# Altium PCB 把手锁主板2079.PcbDoc (part 2 of 2)
Units mm, origin at the board's own origin, x right, y up, seen from the top; angles counter-clockwise.
Board outline 151.13 x 26.04 mm, 2 copper layers (Top Layer, Bottom Layer); 73 components, 56 nets, 239 pads, 289 vias.
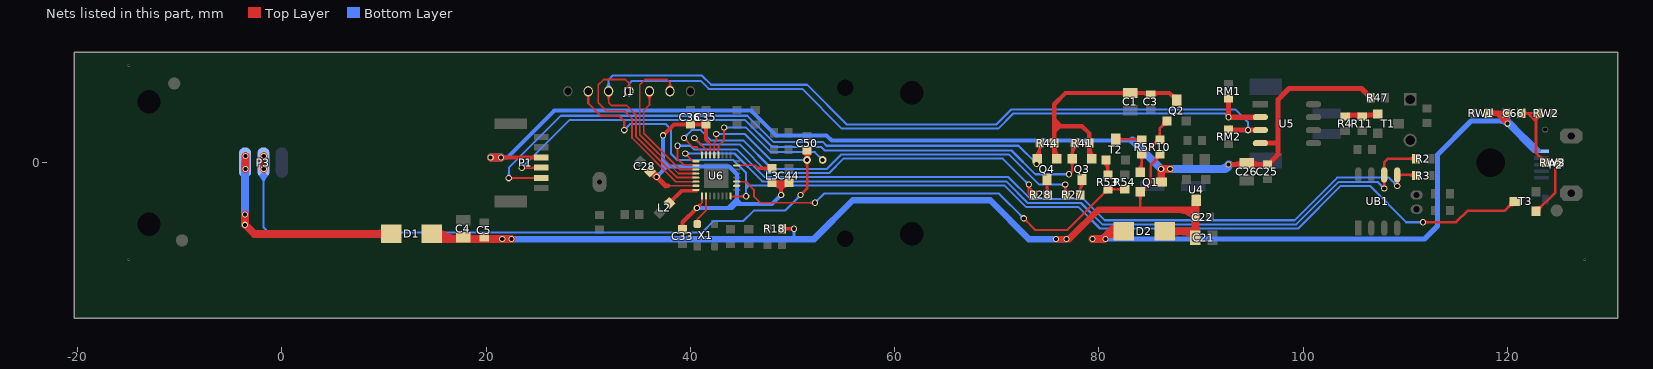
[diagram p2: the nets of this part, all layers, seen from the top]

## Via types
v1: diameter 0.61, hole 0.406, Top Layer to Bottom Layer, tented both sides, 289 vias

## Nets (pads, with @x,y where several pads share a name; then routed paths per layer and width w, separated by ;. In a path a pad name is that pad's centre, name@x,y a point inside that pad or via, vN(x,y) a via of type N, cw(c..) or ccw(c..) an arc to the next point about the centre after c; other vN are vias at no path point) (continued)
NetC66_2: C66.2 RW2.2 RW3.2 | length 12.5
  Top Layer w0.254: C66.2@121.361,4.826 122.02,4.826 ; C66.2@121.554,4.633 cw(c122.02,4.167) 122.02,4.826 ; C66.2@121.554,5.019 ccw(c122.02,5.485) 122.02,4.826 ; 122.809,3.977 cw(c123.377,3.977) RW2.2@123.199,4.517 ; 122.809,4.328 cw(c123.262,4.328) RW2.2@123.12,4.758 ; RW2.2@122.809,4.814 122.809,4.037 ; RW2.2@122.921,4.633 ccw(c122.455,4.167) 122.455,4.826 ccw(c122.455,5.485) RW2.2@122.921,5.019 ; RW2.2@123.114,4.826 122.02,4.826 ; 123.197,0.551 ccw(c123.749,1.103) RW3.2@123.749,0.323 ; 123.318,0.431 cw(c122.937,0.05) RW3.2@123.476,0.05 ; RW3.2@123.749,0 122.809,0.94 122.809,4.037 ; 122.02,4.826 122.809,4.037
NetD1_1: D1.1 P3.3 | length 27.1
  Top Layer w0.762: v1(-3.6,-5.08) v1(-3.6,-6.096) -2.711,-6.985 ; v1(-3.556,-0.635) v1(-3.556,0.635) ; -0.635,-6.985 -2.711,-6.985 ; D1.1@10.233,-7.352 ccw(c9.347,-8.238) 9.347,-6.985 ccw(c9.347,-5.732) D1.1@10.233,-6.618 ; D1.1@10.7,-6.985 -2.711,-6.985
  Bottom Layer w0.762: v1(-3.6,-6.096) v1(-3.6,-5.08) P3.3@-3.6,0
NetL2_2: L2.2 U6.32 | length 4
  Top Layer w0.356: L2.2@37.968,-3.942 39.134,-2.776 40.622,-2.776 ; L2.2@37.968,-3.72 ccw(c37.968,-3.183) 38.347,-3.563 ccw(c38.727,-3.942) L2.2@38.19,-3.942
NetL3_2: L3.2 U6.15 | length 4.5
  Top Layer w0.178: U6.15@44.545,-0.27 46.355,-0.27 46.644,-0.559
  Top Layer w0.305: 46.644,-0.559 L3.2@48.006,-0.559 ; L3.2@47.781,-0.734 ccw(c47.358,-1.157) 47.358,-0.559 ccw(c47.358,0.039) L3.2@47.781,-0.384
NetQ1_G: Q1.G Q2.G R5.1 R10.2 | length 13.6
  Top Layer w0.203: Q1.G@84.074,-0.955 84.201,-0.828 Q1.G@84.379,-0.65 ; R5.1@84.201,0.457 84.379,0.635 84.379,0.813 R5.1@84.379,0.94
  Top Layer w0.254: Q1.G@83.841,-0.722 ccw(c82.97,0.149) 84.201,0.149 ; R5.1@84.008,0.62 cw(c83.542,0.154) 84.201,0.154 cw(c84.86,0.154) R5.1@84.394,0.62 ; Q1.G@84.02,-0.901 ccw(c83.583,-0.464) 84.201,-0.464 ccw(c84.565,-0.464) Q1.G@84.307,-0.722 ; Q1.G@84.201,-0.828 R5.1@84.201,0.457 ; R5.1@84.201,0.813 84.379,0.813 85.801,2.235 R10.2@85.979,2.235 ; R5.1@84.251,1.086 ccw(c84.251,2.053) 84.935,1.369 ; R5.1@84.524,0.813 cw(c84.875,0.813) R5.1@84.627,1.061 ; 85.245,1.679 cw(c85.929,0.995) R10.2@85.929,1.962 ; R10.2@85.553,1.987 ccw(c85.305,2.235) R10.2@85.656,2.235 ; R10.2@85.786,2.428 ccw(c85.32,2.894) 85.979,2.894 ccw(c86.638,2.894) R10.2@86.172,2.428 ; R10.2@85.979,2.54 85.979,3.363 Q2.G@86.68,4.064 ; Q2.G@86.35,4.064 cw(c85.553,4.064) 86.116,3.5 cw(c86.68,2.937) Q2.G@86.68,3.734
NetR4_1: R4.1 R11.1 T1.1 | length 18.5
  Top Layer w0.254: R4.1@104.203,4.508 cw(c104.812,3.899) 104.812,4.76 ; R4.1@104.383,4.714 ccw(c104.849,5.18) 104.849,4.521 ccw(c104.849,3.862) 104.383,4.328 cw(c105.426,3.286) R11.1@105.426,4.76 ; R4.1@104.505,4.76 cw(c104.505,3.286) 105.548,4.328 ccw(c105.082,3.862) 105.082,4.521 ccw(c105.082,5.18) R11.1@105.548,4.714 ; 105.119,4.76 cw(c105.119,3.899) R11.1@105.728,4.508 ; R11.1@105.854,4.508 cw(c106.463,3.899) 106.463,4.76 ; R11.1@105.941,4.521 ccw(c105.941,6.134) 107.082,4.993 cw(c106.518,5.557) 106.518,4.76 cw(c106.518,3.963) T1.1@107.082,4.527 ; R11.1@106.034,4.714 ccw(c106.5,5.18) 106.5,4.521 ccw(c106.5,3.862) 106.034,4.328 cw(c107.077,3.286) T1.1@107.077,4.76 ; 106.554,4.521 ccw(c106.554,5.521) T1.1@107.261,4.814 ; R4.1@104.14,4.521 104.379,4.76 T1.1@107.315,4.76 107.076,4.521 R11.1@105.791,4.521 R4.1@104.14,4.521
NetR5_2: R5.2 T2.3 | length 5.2
  Top Layer w0.203: T2.3@81.661,2.286 R5.2@84.379,2.286 ; T2.3@81.912,2.035 cw(c82.519,1.428) 82.519,2.286 cw(c82.519,3.144) T2.3@81.912,2.537 ; 83.308,2.286 cw(c83.308,1.392) R5.2@83.94,2.024 ; 83.553,2.286 ccw(c83.553,2.833) R5.2@83.94,2.446
NetR27_2: R27.2 U6.24 | length 49
  Top Layer w0.178: v1@39.37,2.197 cw(c39.37,1.676) 39.739,2.044 cw(c40.107,2.413) v1@39.586,2.413 ; v1(39.37,2.413) 40.259,1.524 40.64,1.524 41.145,1.019 U6.24@41.145,0.73
  Top Layer w0.203: R27.2@76.548,-2.914 ccw(c76.161,-2.527) 76.708,-2.527 ; v1@76.564,-2.303 cw(c76.217,-2.65) 76.708,-2.65 cw(c77.199,-2.65) v1@76.852,-2.303 ; v1@76.708,-2.282 ccw(c77.602,-2.282) R27.2@76.97,-2.914 ; v1(76.708,-2.159) 76.708,-3.124 R27.2@76.759,-3.175
  Bottom Layer w0.203: v1(39.37,2.413) 40.132,3.175 41.021,3.175 42.015,2.181 45.19,2.181 47.997,-0.626 53.349,-0.626 54.759,0.784 71.225,0.784 74.168,-2.159 v1(76.708,-2.159) ; v1@39.37,2.616 ccw(c39.37,3.107) 39.717,2.76 ccw(c40.064,2.413) v1@39.573,2.413 ; v1@76.564,-2.303 ccw(c76.217,-2.65) 76.217,-2.159 ccw(c76.217,-1.668) v1@76.564,-2.015
NetR28_2: R28.2 U6.23 | length 45.3
  Top Layer w0.178: v1@40.386,2.197 cw(c40.386,1.676) 40.755,2.044 cw(c41.123,2.413) v1@40.602,2.413 ; v1(40.386,2.413) 41.545,1.254 U6.23@41.545,0.73
  Top Layer w0.254: v1@73.026,-2.285 cw(c72.723,-2.588) 73.152,-2.588 cw(c73.581,-2.588) v1@73.278,-2.285 ; 73.152,-2.855 ccw(c73.67,-2.855) R28.2@73.512,-3.349 ; 73.152,-2.507 ccw(c73.782,-2.507) R28.2@73.59,-3.107 ; R28.2@73.311,-3.113 ccw(c72.852,-3.093) 73.177,-2.768 ccw(c73.427,-2.518) R28.2@73.516,-2.861 ; R28.2@73.584,-3.175 73.152,-2.743 v1(73.152,-2.159) ccw(c73.893,-2.159) R28.2@73.667,-2.865
  Bottom Layer w0.203: v1@40.386,2.21 cw(c40.386,1.719) 40.733,2.066 cw(c41.08,2.413) v1@40.589,2.413 ; v1(40.386,2.413) 41.021,1.778 44.831,1.778 47.638,-1.029 53.581,-1.029 54.991,0.381 70.612,0.381 v1(73.152,-2.159) ; v1@72.949,-2.159 ccw(c72.458,-2.159) 72.805,-1.812 ccw(c73.152,-1.465) v1@73.152,-1.956
NetR53_2: R53.2 T2.1 | length 4.3
  Top Layer w0.254: T2.1@80.478,0.021 cw(c79.46,-0.997) R53.2@80.899,-0.997 ; T2.1@80.657,0.2 cw(c80.073,-0.384) 80.899,-0.384 ; R53.2@80.706,-1.001 ccw(c80.24,-0.535) 80.899,-0.535 ccw(c81.558,-0.535) R53.2@81.092,-1.001 ; T2.1@80.711,0.254 80.899,0.066 R53.2@80.899,-1.194
NetRW3_1: RW3.1 T3.1 | length 7.8
  Top Layer w0.254: T3.1@122.809,-4.76 122.875,-4.76 124.714,-2.921 124.714,-0.635 125.171,-0.178 RW3.1@125.171,0 ; T3.1@122.809,-4.43 ccw(c122.809,-3.473) 123.485,-4.15 ; T3.1@123.139,-4.76 cw(c123.777,-4.76) 123.326,-4.309 ; 124.778,-0.571 ccw(c124.436,-0.229) RW3.1@124.906,-0.115 ; RW3.1@124.923,-0.426 cw(c125.171,-0.674) RW3.1@125.171,-0.323
NetU6_2: U6.2 X1.1 | length 3.7
  Top Layer w0.152: X1.1@40.525,-6.035 X1.1@40.525,-5.885
  Top Layer w0.178: X1.1@40.567,-5.726 ccw(c40.483,-5.549) 40.679,-5.549 ; X1.1@40.679,-6.012 40.679,-5.549 ; X1.1@40.791,-5.726 cw(c40.875,-5.549) 40.679,-5.549 ; U6.2@41.545,-3.27 41.545,-4.683 40.679,-5.549
P04/LED_RED: J1.3 U6.27 | length 12.3
  Top Layer w0.178: J1.3@35.75,6.68 cw(c35.133,6.063) 36.005,6.063 cw(c36.877,6.063) J1.3@36.26,6.68 ; J1.3@36.005,6.985 36.005,5.652 35.433,5.08 35.433,2.873 38.976,-0.67 U6.27@40.545,-0.67
P05/LED_GREEN: J1.2 U6.28 | length 17.3
  Top Layer w0.178: J1.2@37.764,7.304 ccw(c37.284,7.842) 38.005,7.842 ; J1.2@38.005,6.985 38.005,7.842 ; J1.2@38.246,7.304 cw(c38.726,7.842) 38.005,7.842 ; U6.28@40.545,-1.07 38.842,-1.07 35.052,2.72 35.052,7.62 35.56,8.128 37.719,8.128 38.005,7.842
P06/MOTO1: J1.5 RM2.2 U5.3 U6.29 | length 88.7
  Top Layer w0.178: J1.5@31.75,6.68 cw(c31.133,6.063) 32.005,6.063 cw(c32.877,6.063) J1.5@32.26,6.68 ; J1.5@32.005,6.985 32.005,5.841 32.258,5.588 33.782,5.588 34.671,4.699 34.671,2.566 38.707,-1.47 U6.29@40.545,-1.47
  Top Layer w0.508: RM2.2@92.786,3.175 v1(94.615,3.175) U5.3@95.825,3.175 ; RM2.2@92.863,3.354 ccw(c93.296,3.788) 93.296,3.175
  Bottom Layer w0.203: J1.5@31.759,7.281 ccw(c31.164,7.876) 32.005,7.876 ccw(c32.846,7.876) J1.5@32.251,7.281 ; J1.5@32.005,6.985 32.005,8.129 32.385,8.509 41.148,8.509 42.037,7.62 51.435,7.62 55.328,3.727 69.969,3.727 71.449,5.207 93.345,5.207 94.615,3.937 v1(94.615,3.175) ; v1@94.471,3.319 ccw(c94.124,3.666) 94.615,3.666 ccw(c95.106,3.666) v1@94.759,3.319
P07/MOTO0: J1.4 RM1.2 U5.2 U6.30 | length 89
  Top Layer w0.178: J1.4@33.782,7.319 ccw(c33.421,7.778) 34.005,7.778 ccw(c34.589,7.778) J1.4@34.228,7.319 ; J1.4@34.005,6.985 34.005,7.778 33.655,8.128 31.496,8.128 30.988,7.62 30.988,5.842 31.75,5.08 33.528,5.08 34.29,4.318 34.29,2.413 38.573,-1.87 U6.30@40.545,-1.87
  Top Layer w0.508: RM1.2@92.71,6.274 v1(92.71,4.445) U5.2@95.825,4.445
  Bottom Layer w0.203: J1.4@33.801,7.318 ccw(c33.514,7.716) 34.005,7.716 ; J1.4@34.005,6.985 34.005,7.716 ; J1.4@34.209,7.318 cw(c34.496,7.716) 34.005,7.716 ; v1(92.71,4.445) 92.351,4.804 71.616,4.804 70.136,3.324 54.842,3.324 50.949,7.217 41.805,7.217 41.021,8.001 34.29,8.001 34.005,7.716
PWR_CTL: R53.1 R54.2 U6.11 | length 49.3
  Top Layer w0.178: U6.11@44.545,-1.87 45.431,-1.87 46.228,-2.667 46.228,-3.302 46.863,-3.937 v1(52.197,-3.937) ; v1@52.044,-4.09 ccw(c51.676,-4.458) 51.676,-3.937 ccw(c51.676,-3.416) v1@52.044,-3.784
  Top Layer w0.203: v1@72.644,-5.664 cw(c72.644,-6.155) 72.991,-5.808 cw(c73.338,-5.461) v1@72.847,-5.461 ; v1(72.644,-5.461) 73.787,-6.604 76.911,-6.604 R53.1@80.899,-2.616 R54.2@82.55,-2.616 ; 80.304,-3.211 ccw(c79.709,-2.616) R53.1@80.551,-2.616 ; 80.425,-3.09 cw(c80.849,-3.514) R53.1@80.849,-2.915 ; R53.1@81.16,-2.827 cw(c81.669,-3.337) 81.669,-2.616 cw(c81.669,-1.896) R53.1@81.16,-2.405 ; R54.2@82.289,-2.827 ccw(c81.78,-3.337) 81.78,-2.616 ccw(c81.78,-1.896) R54.2@82.289,-2.405
  Bottom Layer w0.203: v1(52.197,-3.937) 53.086,-3.048 70.231,-3.048 v1(72.644,-5.461) ; v1@52.197,-3.734 ccw(c52.197,-3.243) 52.544,-3.59 ccw(c52.891,-3.937) v1@52.4,-3.937 ; v1@72.441,-5.461 ccw(c71.95,-5.461) 72.297,-5.114 ccw(c72.644,-4.767) v1@72.644,-5.258
REMOTO: U6.10
RSTN: J1.6 T3.3 U6.8 | length 114.8
  Top Layer w0.203: J1.6@29.759,6.689 cw(c29.164,6.094) 30.005,6.094 cw(c30.846,6.094) J1.6@30.251,6.689 ; J1.6@30.005,6.985 30.005,5.809 31.242,4.572 33.02,4.572 33.528,4.064 v1(33.528,3.175) ; v1@33.384,3.319 ccw(c33.037,3.666) 33.528,3.666 ccw(c34.019,3.666) v1@33.672,3.319 ; U6.8@43.947,-3.27 43.979,-3.302 v1(45.466,-3.302) ; v1@45.322,-3.446 ccw(c44.975,-3.793) 44.975,-3.302 ccw(c44.975,-2.811) v1@45.322,-3.158
  Top Layer w0.254: v1(111.76,-5.842) 114.997,-5.842 116.14,-4.699 119.761,-4.699 120.65,-3.81 T3.3@120.777,-3.81 ; v1@111.886,-5.968 cw(c112.189,-6.271) 112.189,-5.842 cw(c112.189,-5.413) v1@111.886,-5.716 ; 120.062,-4.398 cw(c120.684,-5.02) T3.3@120.684,-4.14 ; 120.145,-4.315 ccw(c119.639,-3.81) T3.3@120.354,-3.81
  Bottom Layer w0.203: v1(33.528,3.175) 34.134,3.781 37.592,3.781 38.1,3.273 38.1,0.889 38.735,0.254 44.196,0.254 45.466,-1.016 45.466,-1.905 ; v1@33.528,3.378 ccw(c33.528,3.869) 33.875,3.522 ccw(c34.222,3.175) v1@33.731,3.175 ; v1@45.322,-3.158 ccw(c44.975,-2.811) 45.466,-2.811 ccw(c45.957,-2.811) v1@45.61,-3.158 ; v1(45.466,-3.302) 45.466,-2.54 ; v1@111.616,-5.986 ccw(c111.269,-6.333) 111.269,-5.842 ccw(c111.269,-5.351) v1@111.616,-5.698 ; v1(111.76,-5.842) 110.109,-5.842 106.553,-2.286 103.697,-2.286 99.528,-6.455 80.115,-6.455 78.029,-4.369 72.884,-4.369 70.754,-2.238 45.799,-2.238 ; 45.466,-2.54 45.466,-2.235 ; 45.466,-2.54 45.768,-2.238 ; 45.466,-2.235 45.466,-1.905 ; 45.466,-2.235 45.469,-2.238 45.768,-2.238 ; 45.466,-1.905 45.799,-2.238 ; 45.768,-2.238 45.799,-2.238
RX2/SETKEY: C50.1 P3.2 pad.2@51.435,0.254 U6.21 | length 92.3
  Top Layer w0.178: U6.21@42.345,0.73 42.345,1.959 42.545,2.159 v1(42.545,2.794) ; v1@42.392,2.68 cw(c42.024,2.311) 42.545,2.311 cw(c43.066,2.311) v1@42.698,2.68
  Top Layer w0.254: v1(50.8,-3.175) 51.435,-2.54 pad.2@51.435,0.254 ; v1@50.8,-2.997 ccw(c50.8,-2.568) 51.104,-2.871 ccw(c51.407,-3.175) v1@50.978,-3.175 ; C50.1@51.13,0.889 pad.2@51.435,0.584 ; C50.1@51.253,0.99 cw(c50.891,0.584) pad.2@51.435,0.584 ; pad.2@51.255,0.074 cw(c50.822,-0.359) 51.435,-0.359 cw(c52.048,-0.359) pad.2@51.615,0.074 ; pad.2@51.255,0.434 ccw(c50.822,0.867) 51.435,0.867 ccw(c52.048,0.867) pad.2@51.615,0.434 ; 51.296,0.723 cw(c50.933,0.361) pad.2@51.435,0.254 ; C50.1@51.435,1.194 pad.2@51.435,0.584 ; 51.495,0.644 ccw(c51.731,0.408) pad.2@51.435,0.254 ; C50.1@51.617,0.99 ccw(c51.979,0.584) pad.2@51.435,0.584 ; pad.2@51.66,0.371 cw(c52.053,0.576) 51.74,0.889 pad.2@51.435,0.584 ; pad.2@51.435,0.254 pad.2@51.435,0.584
  Top Layer w0.762: v1(-1.778,-0.635) v1(-1.778,0.635)
  Bottom Layer w0.178: v1@42.684,2.641 cw(c43.053,2.273) 43.053,2.794 cw(c43.053,3.315) v1@42.684,2.947
  Bottom Layer w0.203: P3.2@-2.152,-1.252 cw(c-3.003,-2.103) -1.8,-2.103 cw(c-0.597,-2.103) P3.2@-1.448,-1.252 ; P3.2@-2.009,-1.109 cw(c-2.513,-1.613) -1.8,-1.613 cw(c-1.087,-1.613) P3.2@-1.591,-1.109 ; P3.2@-1.922,-0.779 cw(c-2.215,-1.072) P3.2@-1.8,-1.072 ; P3.2@-1.922,-0.491 ccw(c-2.215,-0.198) P3.2@-1.8,-0.198 ; P3.2@-1.8,-1.179 cw(c-1.234,-1.179) P3.2@-1.634,-0.779 ; P3.2@-1.8,-0.091 ccw(c-1.234,-0.091) P3.2@-1.634,-0.491 ; P3.2@-1.8,0 -1.8,-6.328 -1.27,-6.858 41.148,-6.858 42.291,-5.715 45.212,-5.715 46.228,-4.699 49.276,-4.699 v1(50.8,-3.175) ; v1(42.545,2.794) 45.339,2.794 47.879,0.254 pad.2@51.435,0.254 ; v1@50.597,-3.175 cw(c50.106,-3.175) 50.453,-3.522 cw(c50.8,-3.869) v1@50.8,-3.378 ; pad.2@51.291,0.11 ccw(c50.944,-0.237) 50.944,0.254 ccw(c50.944,0.745) pad.2@51.291,0.398
SCL: R2.2 U6.25 UB1.6 | length 85.9
  Top Layer w0.178: v1@39.484,0.686 cw(c39.484,0.165) 39.853,0.533 cw(c40.221,0.902) v1@39.7,0.902 ; v1(39.497,0.889) 40.256,0.13 U6.25@40.545,0.13
  Top Layer w0.254: v1@107.824,-2.414 ccw(c107.521,-2.111) 107.95,-2.111 ccw(c108.379,-2.111) v1@108.076,-2.414 ; UB1.6@107.828,-1.782 cw(c107.532,-2.078) 107.95,-2.078 cw(c108.368,-2.078) UB1.6@108.072,-1.782 ; UB1.6@107.828,-0.638 ccw(c107.532,-0.342) 107.95,-0.342 ccw(c108.368,-0.342) UB1.6@108.072,-0.638 ; v1(107.95,-2.54) UB1.6@107.95,-1.21 107.95,0 108.331,0.381 R2.2@111.049,0.381 ; R2.2@110.856,0.188 ccw(c110.39,-0.278) 110.39,0.381 ccw(c110.39,1.04) R2.2@110.856,0.574
  Bottom Layer w0.203: v1(39.497,0.889) 44.323,0.889 47.047,-1.835 70.921,-1.835 73.045,-3.959 78.254,-3.959 80.347,-6.052 99.339,-6.052 103.508,-1.883 107.293,-1.883 v1(107.95,-2.54) ; v1@39.636,0.736 cw(c40.005,0.368) 40.005,0.889 cw(c40.005,1.41) v1@39.636,1.042 ; v1@107.747,-2.54 ccw(c107.256,-2.54) 107.603,-2.193 ccw(c107.95,-1.846) v1@107.95,-2.337
SDA: R3.2 U6.26 UB1.5 | length 91.1
  Top Layer w0.178: v1@38.582,1.512 cw(c38.214,1.143) 38.735,1.143 cw(c39.256,1.143) v1@38.888,1.512 ; v1(38.735,1.651) 38.735,0.381 39.386,-0.27 U6.26@40.545,-0.27
  Top Layer w0.254: v1@109.094,-2.16 ccw(c108.791,-1.857) 109.22,-1.857 ccw(c109.649,-1.857) v1@109.346,-2.16 ; UB1.5@109.098,-1.782 cw(c108.802,-2.078) 109.22,-2.078 cw(c109.638,-2.078) UB1.5@109.342,-1.782 ; v1(109.22,-2.286) UB1.5@109.22,-1.21 110.989,-1.21 R3.2@111.049,-1.27 ; UB1.5@109.342,-1.332 cw(c109.638,-1.628) 109.638,-1.21 cw(c109.638,-0.792) UB1.5@109.342,-1.088 ; 110.366,-1.21 cw(c110.366,-1.903) R3.2@110.856,-1.413 ; 110.414,-1.21 ccw(c110.414,-0.585) R3.2@110.856,-1.027
  Bottom Layer w0.203: v1(38.735,1.651) 40.005,1.651 40.364,1.292 44.555,1.292 47.279,-1.432 50.2,-1.432 ; v1@38.874,1.498 cw(c39.243,1.13) 39.243,1.651 cw(c39.243,2.172) v1@38.874,1.804 ; 53.975,-1.432 50.2,-1.432 ; v1@109.017,-2.286 ccw(c108.526,-2.286) 108.873,-1.939 ccw(c109.22,-1.592) v1@109.22,-2.083 ; v1(109.22,-2.286) 108.414,-1.48 103.341,-1.48 99.172,-5.648 80.578,-5.648 78.486,-3.556 73.279,-3.556 71.155,-1.432 50.2,-1.432
TX2: pad.0 U6.20 | length 16.4
  Top Layer w0.178: U6.20@42.745,0.73 42.745,1.623 43.307,2.185 v1(43.307,3.429) ; v1@43.154,3.29 cw(c42.786,2.921) 43.307,2.921 cw(c43.828,2.921) v1@43.46,3.29
  Bottom Layer w0.203: v1@43.18,3.429 v1(43.307,3.429) 45.466,3.429 47.879,1.016 52.197,1.016 pad.0@52.959,0.254 ; v1@43.446,3.276 cw(c43.815,2.908) 43.815,3.429 cw(c43.815,3.95) v1@43.446,3.582 ; pad.0@52.756,0.254 ccw(c52.265,0.254) 52.612,0.601 ccw(c52.959,0.948) pad.0@52.959,0.457
UART_RD: P1.5 Q4.S R44.1 | length 72.4
  Top Layer w0.203: v1(22.225,-1.524) 25.376,-1.524 P1.5@25.4,-1.5 ; v1@22.369,-1.668 cw(c22.716,-2.015) 22.716,-1.524 cw(c22.716,-1.033) v1@22.369,-1.38 ; 24.463,-1.524 ccw(c24.463,-0.963) P1.5@24.86,-1.36 ; 24.579,-1.524 cw(c24.579,-1.921) P1.5@24.86,-1.64
  Top Layer w0.254: Q4.S@73.747,0.614 ccw(c72.606,1.755) R44.1@74.219,1.755 ; Q4.S@73.789,0.112 cw(c73.616,-0.131) 73.914,-0.131 cw(c74.113,-0.131) Q4.S@74.063,0.061 ; Q4.S@73.853,0.508 Q4.S@73.98,0.381 73.914,0.315 v1(73.914,-0.127) 74.219,0.178 R44.1@74.219,1.905 R44.1@73.98,1.666 ; Q4.S@73.926,0.435 ccw(c73.219,1.142) 74.219,1.142 ; v1@73.968,-0.181 ccw(c73.362,0.425) Q4.S@74.219,0.425 ; R44.1@74.026,1.662 cw(c73.56,1.196) 74.219,1.196 cw(c74.878,1.196) R44.1@74.412,1.662 ; Q4.S@74.04,-0.001 cw(c74.343,0.302) 73.914,0.302 cw(c73.485,0.302) 73.788,-0.001 ccw(c72.749,1.038) 74.219,1.038
  Bottom Layer w0.203: v1@22.081,-1.38 ccw(c21.734,-1.033) 22.225,-1.033 ccw(c22.716,-1.033) v1@22.369,-1.38 ; v1(22.225,-1.524) 22.225,-0.508 27.321,4.588 45.577,4.588 48.133,2.032 52.959,2.032 53.34,1.651 72.136,1.651 v1(73.914,-0.127) ; v1@73.711,-0.127 ccw(c73.22,-0.127) 73.567,0.22 ccw(c73.914,0.567) v1@73.914,0.076
UART_RD1: Q4.D R28.1 | length 3.8
  Top Layer w0.254: Q4.D@74.697,-1.977 cw(c74.133,-2.541) 74.93,-2.541 cw(c75.727,-2.541) Q4.D@75.163,-1.977 ; R28.1@74.813,-2.932 ccw(c74.531,-2.65) 74.93,-2.65 ; 74.93,-2.282 ccw(c75.849,-2.282) R28.1@75.199,-2.932 ; Q4.D@74.93,-1.651 74.93,-3.099 R28.1@75.006,-3.175
UART_TD: P1.4 Q3.S R41.1 | length 71
  Top Layer w0.203: v1(23.495,-0.508) 25.392,-0.508 P1.4@25.4,-0.5 ; v1@23.639,-0.652 cw(c23.986,-0.999) 23.986,-0.508 cw(c23.986,-0.017) v1@23.639,-0.364 ; 24.502,-0.508 ccw(c24.502,-0.002) P1.4@24.86,-0.36 ; 24.54,-0.508 cw(c24.54,-0.96) P1.4@24.86,-0.64
  Top Layer w0.254: v1(77.089,-1.143) 77.409,-0.823 Q3.S@77.409,0.381 77.409,1.666 R41.1@77.648,1.905 ; v1@77.089,-0.965 ccw(c77.089,-0.536) 77.393,-0.839 ccw(c77.696,-1.143) v1@77.267,-1.143 ; Q3.S@77.176,0.148 cw(c76.612,-0.416) 77.409,-0.416 cw(c78.206,-0.416) Q3.S@77.642,0.148 ; Q3.S@77.176,0.614 ccw(c76.612,1.178) 77.409,1.178 ccw(c78.206,1.178) Q3.S@77.642,0.614 ; Q3.S@77.409,0.619 cw(c78.883,0.619) R41.1@77.841,1.662 ; 77.409,1.233 cw(c78.27,1.233) R41.1@77.661,1.842
  Bottom Layer w0.203: v1(23.495,-0.508) 28.188,4.185 45.345,4.185 48.006,1.524 52.832,1.524 53.169,1.187 71.457,1.187 73.787,-1.143 v1(77.089,-1.143) ; v1@23.495,-0.305 ccw(c23.495,0.186) 23.842,-0.161 ccw(c24.189,-0.508) v1@23.698,-0.508 ; v1@76.945,-1.287 ccw(c76.598,-1.634) 76.598,-1.143 ccw(c76.598,-0.652) v1@76.945,-0.999
UART_TD1: Q3.D R27.1 | length 6.3
  Top Layer w0.152: R27.1@77.952,-2.896 ccw(c77.399,-2.343) 78.181,-2.343 ccw(c78.963,-2.343) R27.1@78.41,-2.896 ; R27.1@78.06,-3.004 ccw(c77.767,-2.711) 78.181,-2.711 ccw(c78.595,-2.711) R27.1@78.302,-3.004 ; Q3.D@78.09,-2.013 cw(c77.868,-2.234) 78.181,-2.234 ; R27.1@78.181,-3.175 Q3.D@78.181,-1.727 ; R27.1@78.181,-3.093 cw(c79.708,-3.093) Q3.D@78.628,-2.013 ; 78.181,-2.725 cw(c79.34,-2.725) Q3.D@78.521,-1.905 ; 78.181,-2.357 cw(c78.972,-2.357) Q3.D@78.413,-1.798
V6V: C25.1 C26.1 P1.3 Q1.D R47.2 U5.4 | length 109.9
  Top Layer w0.406: v1(21.463,0.508) 25.392,0.508 P1.3@25.4,0.5
  Top Layer w0.508: v1(92.71,-0.178) C25.1@96.52,-0.178 96.596,-0.178 97.536,0.762 97.536,1.905 ; 93.365,-0.178 ccw(c93.365,0.869) C26.1@94.105,0.129 ; C26.1@94.871,0.129 ccw(c95.611,0.869) 95.611,-0.178 ; U5.4@95.825,1.905 97.536,1.905 ; R47.2@106.269,6.685 ccw(c106.604,7.019) R47.2@106.604,6.546 ; R47.2@106.604,6.35 105.715,7.239 98.628,7.239 97.536,6.147 97.536,1.905
  Top Layer w0.762: v1(20.447,0.508) v1(21.463,0.508) ; Q1.D@86.106,-1.905 v1(86.106,-0.635) v1(86.995,-0.635)
  Bottom Layer w0.406: v1(21.463,0.508) 22.098,0.508 26.683,5.093 45.961,5.093 48.387,2.667 53.34,2.667 53.848,2.159 83.312,2.159
  Bottom Layer w0.762: v1(20.447,0.508) v1(21.463,0.508) ; 83.312,2.159 v1(86.106,-0.635) v1(86.995,-0.635) 92.253,-0.635 ; 91.79,-0.635 ccw(c91.79,0.742) v1@92.764,-0.232 ; v1(92.71,-0.178) 92.253,-0.635 ; v1@92.785,-0.192 cw(c92.253,-0.094) 92.253,-0.635
VBAT: C4.1 C5.1 C21.1 C22.1 D1.2 D2.2 Q1.S R10.1 R18.1 U4.3 | length 112.2
  Top Layer w0.254: Q1.S@83.841,-3.088 cw(c83.277,-3.652) 84.074,-3.652 cw(c84.871,-3.652) Q1.S@84.307,-3.088 ; 84.074,-4.597 Q1.S@84.074,-2.855 84.191,-2.855 85.09,-1.956 85.09,-0.254 85.801,0.457 R10.1@85.801,0.635 ; Q1.S@84.074,-2.525 ccw(c84.074,-1.446) 84.837,-2.209 ; Q1.S@84.404,-2.855 cw(c84.919,-2.855) 84.555,-2.491 ; 85.302,-0.042 ccw(c84.447,0.813) R10.1@85.656,0.813 ; 85.735,0.391 ccw(c85.314,0.813) R10.1@85.91,0.813
  Top Layer w0.305: R18.1@48.971,-6.477 v1(50.165,-6.477) ; R18.1@49.146,-6.652 cw(c49.569,-7.075) 49.569,-6.477 cw(c49.569,-5.879) R18.1@49.146,-6.302 ; v1@50.057,-6.585 ccw(c49.797,-6.845) 49.797,-6.477 ccw(c49.797,-6.109) v1@50.057,-6.369
  Top Layer w0.635: v1(75.819,-7.493) v1(76.835,-7.493) 77.089,-7.493 79.985,-4.597 84.074,-4.597 89.433,-4.597 89.459,-4.572 ; v1@76.835,-7.506 ccw(c76.835,-6.923) 77.247,-7.335 ; 87.602,-4.597 cw(c87.602,-7.141) C22.1@89.4,-5.342
  Top Layer w0.762: D1.2@14.7,-6.985 15.208,-7.493 v1(21.59,-7.493) v1(22.479,-7.493) ; D1.2@15.167,-6.618 ccw(c17.279,-4.506) C4.1@17.279,-7.493 ; 16.841,-7.493 ccw(c16.841,-6.579) C4.1@17.487,-7.225 ; C4.1@18.073,-7.225 ccw(c18.719,-6.579) 18.719,-7.493 ; 19.287,-7.493 ccw(c19.287,-6.84) C5.1@19.749,-7.302 ; C5.1@19.875,-7.302 ccw(c20.337,-6.84) 20.337,-7.493 ; D2.2@86.455,-6.731 89.459,-6.731 C22.1@89.459,-5.334 89.459,-4.572 89.459,-3.759 U4.3@89.535,-3.683 ; D2.2@86.922,-7.098 cw(c87.808,-7.984) 87.808,-6.731 cw(c87.808,-5.478) D2.2@86.922,-6.364 ; 88.11,-6.731 cw(c88.11,-8.512) C21.1@89.369,-7.253
  Bottom Layer w0.305: v1@50.057,-6.585 cw(c49.797,-6.845) 50.165,-6.845 cw(c50.533,-6.845) v1@50.273,-6.585 ; 50.165,-7.493 v1(50.165,-6.477)
  Bottom Layer w0.635: v1(21.59,-7.493) v1(22.479,-7.493) 50.165,-7.493 52.122,-7.493 55.916,-3.699 69.358,-3.699 73.152,-7.493 v1(75.819,-7.493) v1(76.835,-7.493)
VBUS: C66.1 D2.1 P2.1 RW1.1 | length 76.4
  Top Layer w0.508: RW1.1@118.186,4.826 118.999,4.826 ; C66.1@119.836,4.673 cw(c119.402,4.24) 120.015,4.24 ; 118.999,4.826 v1(120.015,3.81) 120.015,4.75 C66.1@119.939,4.826 118.999,4.826
  Top Layer w0.762: v1(79.375,-7.493) 80.391,-7.493 81.153,-6.731 ; v1@80.552,-7.332 cw(c81.415,-8.195) D2.1@82.075,-7.168 ; v1@80.569,-7.493 cw(c80.998,-7.493) 80.695,-7.189 ; 80.883,-7.001 cw(c82.153,-8.27) D2.1@82.387,-6.49 ; 81.221,-6.663 cw(c81.938,-7.38) D2.1@82.486,-6.526 ; D2.1@81.977,-7.087 ccw(c81.153,-7.863) 81.153,-6.731 ; D2.1@81.977,-6.375 cw(c81.153,-5.599) 81.153,-6.731 ; D2.1@82.455,-6.731 81.153,-6.731
  Bottom Layer w0.508: v1(79.375,-7.493) 111.887,-7.493 113.157,-6.223 113.157,0.762 116.459,4.064 119.761,4.064 ; 119.279,4.064 cw(c119.279,3.074) v1@119.979,3.774 ; v1@120.015,3.759 cw(c120.015,2.717) 120.752,3.454 ; P2.1@123.063,1.194 P2.1@123.012,1.194 ; 119.761,4.064 120.142,4.064 120.396,3.81 ; 119.761,4.064 v1(120.015,3.81) ; v1(120.015,3.81) 122.631,1.194 P2.1@123.012,1.194 ; v1(120.015,3.81) 120.396,3.81 ; 120.396,3.81 P2.1@123.012,1.194 ; v1@120.029,3.761 cw(c120.189,3.222) 120.586,3.62 ccw(c120.189,3.222) v1@120.029,3.761
  other v1: 80.645,-7.493
VDD: C28.2 C33.2 C35.2 C36.2 C44.2 L3.1 U6.1 U6.22 U6.31 | length 58.1
  Top Layer w0.178: 37.846,-2.27 U6.31@40.545,-2.27 ; v1@40.64,-4.229 ccw(c40.64,-3.708) 41.009,-4.076 ccw(c41.377,-4.445) v1@40.856,-4.445 ; 40.894,-4.191 41.145,-3.94 U6.1@41.145,-3.27 ; 41.737,2.078 41.945,1.87 U6.22@41.945,0.73
  Top Layer w0.406: C28.2@36.068,-0.635 C28.2@36.19,-0.757 ; C28.2@36.098,-1.045 cw(c36.098,-1.656) v1@36.53,-1.224 ; v1(37.338,2.667) 38.405,3.734 C36.2@40.005,3.734 C35.2@41.529,3.734 41.529,2.286 41.737,2.078 ; 37.576,-2.27 37.846,-2.27 ; C33.2@39.104,-6.389 ccw(c38.768,-6.053) 39.243,-6.053 ccw(c39.718,-6.053) C33.2@39.382,-6.389 ; C33.2@39.243,-6.528 39.243,-5.842 v1(40.64,-4.445) 40.894,-4.191 ; C36.2@39.816,3.595 ccw(c39.48,3.259) 39.48,3.734 ccw(c39.48,4.209) C36.2@39.816,3.873 ; C36.2@40.194,3.595 cw(c40.53,3.259) 40.53,3.734 cw(c40.53,4.209) C36.2@40.194,3.873 ; C35.2@41.34,3.595 ccw(c41.004,3.259) 41.004,3.734 ccw(c41.004,4.209) C35.2@41.34,3.873 ; C35.2@41.39,3.595 cw(c41.054,3.259) 41.529,3.259 cw(c42.004,3.259) C35.2@41.668,3.595 ; L3.1@48.006,-1.981 L3.1@48.336,-1.981 ; L3.1@48.056,-2.178 cw(c48.056,-3.33) 48.87,-2.515 ; L3.1@48.195,-2.12 cw(c48.531,-2.456) 48.531,-1.981 cw(c48.531,-1.506) L3.1@48.195,-1.842 ; v1(48.895,-3.175) 48.895,-2.54 ; 49.01,-2.425 cw(c49.607,-3.023) C44.2@49.607,-2.178 ; C44.2@49.468,-2.12 ccw(c49.132,-2.456) 49.132,-1.981 ccw(c49.132,-1.506) C44.2@49.468,-1.842 ; C44.2@49.657,-1.981 C44.2@49.454,-1.981 ; L3.1@48.336,-1.981 48.895,-1.981 ; L3.1@48.336,-1.981 48.895,-2.54 ; 48.895,-2.54 C44.2@49.454,-1.981 ; 48.895,-2.54 48.895,-1.981 ; 48.895,-1.981 C44.2@49.454,-1.981
  Top Layer w0.508: v1(36.703,-1.397) 37.576,-2.27
  Top Layer w0.762: C28.2@36.19,-0.884 v1(36.703,-1.397)
  Bottom Layer w0.406: v1(36.703,-1.397) 37.338,-0.762 ; 37.338,1.397 37.338,0.254 ; v1(37.338,2.667) 37.338,0.254 ; 38.1,-0.381 37.973,-0.381 ; v1(40.64,-4.445) 43.688,-4.445 ; v1(48.895,-3.175) 48.006,-4.064 44.958,-4.064 ; 37.338,-0.762 37.719,-0.381 ; 37.338,-0.762 37.338,-0.381 ; 37.338,-0.381 37.338,0.254 ; 37.338,-0.381 37.719,-0.381 ; 37.338,0.254 37.973,-0.381 ; 37.719,-0.381 37.973,-0.381 ; 37.973,-0.381 43.815,-0.381 44.577,-1.143 44.577,-3.556 ; 43.688,-4.445 44.069,-4.445 44.45,-4.064 ; 43.688,-4.445 44.577,-3.556 ; 44.45,-4.064 44.577,-4.064 ; 44.45,-4.064 44.577,-3.937 ; 44.577,-4.064 44.831,-4.064 ; 44.577,-4.064 44.577,-3.937 ; 44.577,-3.937 44.577,-3.81 ; 44.577,-3.81 44.577,-3.683 ; 44.577,-3.81 44.831,-4.064 ; 44.577,-3.683 44.958,-4.064 ; 44.577,-3.683 44.577,-3.556 ; 44.831,-4.064 44.958,-4.064
VDD3V3: C1.1 C3.1 Q2.D Q3.G Q4.G R41.2 R44.2 | length 36
  Top Layer w0.406: R44.2@75.502,1.716 cw(c75.166,1.38) 75.641,1.38 cw(c76.116,1.38) R44.2@75.78,1.716 ; R44.2@75.502,2.094 ccw(c75.166,2.43) 75.641,2.43 ccw(c76.116,2.43) R44.2@75.78,2.094 ; R44.2@75.641,1.571 ccw(c77.07,1.571) Q4.G@76.06,0.561 ; Q4.G@75.88,0.381 75.641,0.62 R44.2@75.641,1.905 75.641,3.048 ; R41.2@78.931,1.716 cw(c78.595,1.38) 79.07,1.38 cw(c79.545,1.38) R41.2@79.209,1.716 ; R41.2@78.931,2.094 ccw(c78.595,2.43) 79.07,2.43 ccw(c79.545,2.43) R41.2@79.209,2.094 ; R41.2@79.07,1.571 ccw(c80.499,1.571) Q3.G@79.489,0.561 ; Q3.G@79.309,0.381 79.07,0.62 R41.2@79.07,1.905 79.07,2.845 78.359,3.556 76.276,3.556 ; C1.1@82.639,6.592 ccw(c82.119,6.071) 82.119,6.807 ccw(c82.119,7.543) C1.1@82.639,7.023 ; C1.1@83.477,6.592 cw(c83.997,6.071) 83.997,6.807 cw(c83.997,7.543) C1.1@83.477,7.023 ; 84.258,6.807 cw(c84.258,5.898) C3.1@84.901,6.541 ; C3.1@85.279,6.541 cw(c85.922,5.898) 85.922,6.807 ; 87.038,6.688 ccw(c87.63,7.28) Q2.D@87.63,6.443 ; Q2.D@87.262,6.464 cw(c86.987,6.189) Q2.D@87.376,6.189 ; Q2.D@87.63,6.096 86.919,6.807 C1.1@83.058,6.807 76.733,6.807 75.641,5.715 75.641,4.191 ; 75.641,3.048 75.641,3.556 ; 75.641,3.048 76.149,3.556 ; 75.641,3.556 76.149,3.556 ; 75.641,3.556 75.641,4.191 ; 75.641,4.191 76.276,3.556 ; 76.149,3.556 76.276,3.556
VDD_SCL: 
VDD_SDA: 
pads on no net: P2.2 P2.3 P2.4 P2.6 P2.7 P2.8 P2.9 U5. U5.1 U6.9 U6.13 UB1. UB1.3 UB1.7 Y2.3

## Polygon pours and split planes (outlines as drawn)
GND on Top Layer "Top Layer-No Net" (hatched 90Degree grid 0.229 track 0.279, remove dead copper, pour order 3): -15.875,-10.16 -15.875,10.16 128.27,10.16 128.27,-10.16 -15.875,-10.16
GND on Bottom Layer "Top Layer-No Net" (hatched 90Degree grid 0.229 track 0.279, remove dead copper, pour order 4): -15.875,-10.16 -15.875,10.16 128.27,10.16 128.27,-10.16 -15.875,-10.16

## Keep-outs
Keep-Out Layer:
  lines w0.254: -15,-7.557 -15,-5.557 cw(c-13,-5.557) -13.167,-3.564 ccw(c-13.25,-2.567) -12.25,-2.567 -12.25,2.454 ccw(c-13.25,2.454) -13.167,3.45 cw(c-13,5.443) -15,5.443 -15,7.5 cw(c-13,7.5) -13,9.5 63.215,9.5 cw(c63.215,8.5) 64.215,8.5 ; -15,-7.5 ccw(c-13,-7.5) -13,-9.5 63.215,-9.5 ; 63.215,-9.5 ccw(c63.215,-8.5) 64.215,-8.5 ; 70.506,-8.5 ccw(c71.506,-8.5) 71.506,-9.5 114,-9.5 ccw(c114,-8.5) 115,-8.5 115,-8.3 cw(c117.5,-8.3) 117.5,-5.8 125.5,-5.8 ccw(c125.5,-3.7) 127.6,-3.7 127.6,3.7 ccw(c125.5,3.7) 125.5,5.8 117.5,5.8 cw(c117.5,8.3) 115,8.3 115,8.5 ccw(c114,8.5) 114,9.5 ; 70.506,8.5 cw(c71.506,8.5) 71.506,9.5 114.1,9.5 ; 64.215,8.47 ccw(c67.36,8.638) 70.506,8.47 ; 64.215,8.47 ccw(c67.36,8.638) 70.506,8.47 ; 64.215,8.47 ccw(c67.36,8.638) 70.506,8.47 ; 64.215,8.47 ccw(c67.36,8.638) 70.506,8.47 ; 64.215,8.47 ccw(c67.36,8.638) 70.506,8.47 ; 1.2,-4.8 ccw(c2.2,-4.8) 2.2,-5.8 7.5,-5.8 ccw(c7.5,-4.8) 8.5,-4.8 cw(c9.5,-4.8) 9.5,-3.8 13.135,-3.8 ccw(c13.135,-2.8) 14.135,-2.8 14.135,2.8 ccw(c13.135,2.8) 13.135,3.8 9.5,3.8 cw(c9.5,4.8) 8.5,4.8 ccw(c7.5,4.8) 7.5,5.8 2.2,5.8 ccw(c2.2,4.8) 1.2,4.8 1.2,-4.8 ; 64.215,-8.584 cw(c67.36,-8.752) 70.506,-8.584 ccw(c67.36,-8.752) 64.215,-8.584

## Other copper
Top Layer:
  region net GND: 42.721,-5.666 42.276,-5.222 41.91,-5.588 42.355,-6.032
  region net GND: 52.888,2.159 52.888,4.064 50.038,4.064 50.038,2.159
  region net GND: 43.625,-6.16 42.482,-5.016 42.122,-5.376 43.265,-6.519
  region net GND: 32.766,-7.747 32.766,-6.223 29.591,-6.223 29.591,-7.747
  region net NetL3_2: 47.879,-0.559 47.562,-0.241 47.244,-0.559 47.562,-0.876
  rectangle net GND: 40.64,-9.017 41.518,-8.173
  region net GND: 82.435,-0.021 82.99,-0.576 83.439,-0.127 82.884,0.428
  rectangle net GND: 82.55,-0.127 83.45,1.27
  rectangle net GND: 81.76,-1.651 83.185,1.28
  rectangle net NetL2_2: 37.968,-3.942 38.481,-3.429
  rectangle net GND: 89.662,-2.54 91.465,3.175
  rectangle net GND: 91.694,0.94 93.929,2.286
  rectangle net GND: 90.475,-8.712 92.913,-4.039
  rectangle net GND: 113.919,-4.953 115.296,-1.905
  region net GND: 123.139,-3.937 123.317,-3.759 122.969,-3.411 122.791,-3.589
  rectangle net GND: 121.844,-3.759 123.317,-1.93
  rectangle net GND: 34.493,-1.143 35.052,-0.432
  rectangle net GND: 35.484,0.127 35.687,0.254
  rectangle net GND: 33.985,-0.203 34.569,0.406
  region net GND: 34.925,-0.508 35.687,0.254 33.528,2.413 32.766,1.651
  rectangle net GND: 33.904,-1.021 34.666,-0.259
  region net GND: 34.64,-0.92 35.687,0.127 34.925,0.889 33.879,-0.158
  rectangle net VBUS: 79.883,-7.874 81.28,-7.332
  rectangle net VBUS: 81.026,-7.874 83.566,-5.715
  rectangle net GND: 26.62,5.866 28.956,8.128
  rectangle net GND: 106.426,0.439 107.823,3.048
  rectangle net GND: 104.917,2.301 108.153,3.698
  rectangle net GND: 108.712,-7.799 110.236,-5.279
  region net GND: 41.148,-8.636 41.593,-8.192 40.874,-7.473 40.43,-7.918
  rectangle net GND: 44.45,-7.112 44.773,-6.604
  region net GND: 44.506,-6.871 44.929,-6.448 44.45,-5.969 44.027,-6.392
  rectangle net GND: 42.799,-7.112 44.45,-5.969
  rectangle net GND: 44.889,-8.603 46.669,-7.397
  rectangle net GND: 48.514,-8.763 53.282,-7.493
  rectangle net GND: 38.608,4.814 45.408,6.096
  rectangle net GND: 37.724,-9.017 41.148,-7.493
  rectangle net GND: 41.91,-6.793 43.053,-5.588
  rectangle net VBUS: 81.28,-7.747 83.566,-5.715
  rectangle net GND: 16.256,-5.715 28.219,-2.159
  rectangle net GND: 19.685,3.048 24.511,4.699
  rectangle net GND: 81.321,4.178 85.985,5.842
  rectangle net GND: 124.079,3.931 125.53,5.334
  rectangle net NetC66_2: 120.904,4.318 123.571,5.334
  rectangle net GND: 49.118,-1.016 50.552,4.734
  region net GND: 43.607,-1.132 44.069,-0.67 43.607,-0.208 43.145,-0.67
  region net RSTN: 44.133,-3.366 44.26,-3.239 44.006,-2.984 43.879,-3.111
  region net RSTN: 43.98,-3.594 44.272,-3.302 44.171,-3.2 43.879,-3.492
  region net GND: 24.511,3.048 24.87,3.407 24.691,3.587 24.331,3.228
  rectangle net GND: 93.98,-3.429 97.79,-1.651
  region net VBUS: 79.972,-7.734 81.509,-6.198 81.026,-5.715 79.489,-7.252
  region net GND: 114.808,-5.207 114.808,-4.699 113.919,-4.699 113.919,-5.207
  region net GND: 115.284,-4.731 115.058,-4.506 114.582,-4.981 114.808,-5.207
  pour cut-out: 40.132,1.143 44.831,1.143 44.831,-3.683 40.132,-3.683
  pour cut-out: 24.257,3.048 24.257,-1.778 24.638,-2.159 27.305,-2.159 27.813,-1.651 27.813,2.921 27.305,3.556 24.765,3.556
  pour cut-out: 41.021,-2.794 41.021,-2.54 40.767,-2.286 37.719,-2.286 36.195,-3.81 33.401,-3.81 32.766,-3.175 32.766,0 32.131,0.635 30.099,0.635 29.464,0 29.464,-5.588 30.226,-6.35 37.465,-6.35
  region net VBAT: 90.043,-3.175 90.043,-8.128 89.916,-8.255 85.598,-8.255 85.344,-8.001 85.344,-5.207 84.709,-4.572 83.312,-4.572 83.312,-4.318 83.566,-4.064 83.566,-2.286 83.693,-2.159 84.963,-2.159 84.963,-3.556 85.217,-3.81 88.265,-3.81 89.027,-3.048 89.916,-3.048
  region net V6V: 87.376,-0.381 87.249,-0.254 85.725,-0.254 85.471,-0.508 85.471,-2.413 85.598,-2.54 86.741,-2.54 86.995,-2.286 86.995,-1.397 87.376,-1.016
  region net M3V3: 88.011,4.445 88.138,4.572 89.027,4.572 89.154,4.445 89.154,-2.413 88.9,-2.667 88.138,-2.667 87.757,-2.286 87.757,1.778 87.249,2.286 87.249,3.048 88.011,3.81
  region net NetC29_2: 33.909,-4.572 34.036,-4.699 34.036,-5.461 33.909,-5.588 30.48,-5.588 30.226,-5.334 30.226,-1.016 30.607,-0.635 31.623,-0.635 32.004,-1.016 32.004,-4.191 32.385,-4.572
  pour cut-out: 39.37,-4.318 39.37,-3.81 38.227,-2.667 37.465,-2.667 36.322,-3.81 33.147,-3.81 32.512,-3.175 32.512,0 32.004,0.508 30.226,0.508 29.718,0 29.718,-5.207 30.607,-6.096 37.592,-6.096
Bottom Layer:
  region net VBAT: 50.165,-7.747 50.616,-7.296 50.165,-6.845 49.714,-7.296
  rectangle net GND: 122.682,-2.032 123.46,-1.5
  rectangle net GND: 93.785,6.133 98.171,8.301
  rectangle net GND: 93.706,-1.016 98.425,1.905
  region net GND: 122.238,-2.604 123.127,-1.714 122.809,-1.397 121.92,-2.286
  region net GND: 122.174,-2.921 123.444,-1.651 123.19,-1.397 121.92,-2.667
  rectangle net GND: 26.67,6.372 29.108,8.255
  region net VBUS: 123.346,0.987 123.537,1.177 122.428,2.286 122.238,2.096
  rectangle net VBUS: 121.92,2.032 122.428,2.286
  region net GND: 86.614,-3.175 86.614,-1.524 82.423,-1.524 82.423,-3.175
  region net M3V3: 91.059,-2.286 90.424,-1.651 89.789,-2.286 90.424,-2.921
  region net M3V3: 90.424,-2.921 90.424,-1.651 88.011,-1.651 88.011,-2.921
  region net GND: 87.382,-3.556 87.382,-1.397 84.709,-1.397 84.709,-3.556
  pour cut-out: 1.27,-1.905 1.27,1.905 0.635,2.54 -4.191,2.54 -4.826,1.905 -4.826,-1.905 -4.191,-2.54 0.635,-2.54
  pour cut-out: 31.115,-0.505 ccw(c31.115,-1.905) 29.715,-1.905 ccw(c31.115,-1.905) 31.115,-3.305 ccw(c31.115,-1.905) 32.515,-1.905 ccw(c31.115,-1.905)

## Silkscreen, mask and mechanical layers (free items; w line width, h text height)
Top Overlay:
  circle w0.508: c0,0 r8.7
  circle w0.254: c61.66,6.843 r2
  circle w0.254: c61.66,-6.957 r2
  circle w0.254: c55.16,-7.457 r1.1
  circle w0.254: c55.16,7.343 r1.1
  circle w0.254: c118.31,0 r2.3
  circle w0.254: c-13.009,5.943 r2
  circle w0.254: c-13.009,-6.057 r2
  text "GND" at 26.67,5.08 h0.76 r270
  text "RSN" at 28.321,5.08 h0.76 r270
  text "P06" at 29.845,5.08 h0.76 r270
  text "P07" at 31.369,5.08 h0.76 r270
  text "P04" at 33.02,5.08 h0.76 r270
  text "P05" at 34.671,5.08 h0.76 r270
  text "M3V3" at 36.195,5.08 h0.76 r270
  text "M3" at 27.178,1.905 h0.76
  text "20-7-9" at 60.579,1.016 h1.02
  text "IN" at 27.178,0.635 h0.76
  text "RF" at 30.734,0.635 h0.76
  text "6V" at 27.178,-0.762 h0.76
  text "V1.0" at 61.722,-0.762 h1.02
  text "T" at 27.178,-2.032 h0.76
  text "RX" at 52.578,-2.032 h0.76 r90
  text "TX" at 53.721,-2.032 h0.76 r90
  text "JYD-BS" at 60.579,-3.175 h1.02
  text "R" at 27.178,-3.683 h0.76
  text "G" at 27.178,-5.08 h0.76
Bottom Overlay:
  circle w0.254: c118.4,0 r2.7
  rectangle: -4.445,1.905 0.762,9.033
  lines w0.254: -6.35,-9.9 -6.35,9.9 ; 5.318,-9 -5.35,-9 -5.35,9 5.35,9 5.35,-9 ; 6.35,-9.9 6.35,9.9
  text "+" at 110.871,7.493 h1.02
  text "M+" at 104.14,5.715 h0.76
  text "M-" at 104.14,1.27 h0.76
  text "BAT" at -3.302,-2.54 h0.76 r90
  text "KEY" at -1.397,-2.54 h0.76 r90
  text "GND" at 0.381,-2.54 h0.76 r90
Mechanical 1:
  text "工艺要求:" at 36.576,21.971 h2.54
  text "1> 板材:FR-4" at 36.576,16.891 h1.27
  text "4> 阻焊:顶层绿油" at 52.451,16.891 h1.27
  text "7> 板框: Keep-out 层" at 69.596,16.891 h1.27
  text "2> 板厚:1.2   mm" at 36.576,14.351 h1.27
  text "5> 阻焊:底层绿油" at 52.451,14.351 h1.27
  text "3> 过孔:盖油" at 36.576,11.811 h1.27
  text "6> 字符:白色双面" at 52.451,11.811 h1.27

## Dimensions
-15,9.5 to -15,-9.5 on Mechanical 1
-15,-9.5 to 127.6,-9.5 on Mechanical 1